# Altium PCB Nimb_Ring_2_0.PcbDoc
Units mm, origin at the board's own origin, x right, y up, seen from the top; angles counter-clockwise.
Board outline 44.45 x 67.3 mm, 4 copper layers (Top Layer, Mid-Layer2, Mid-Layer3, Bottom Layer), stack 0.58 mm thick; 68 components, 41 nets, 161 pads, 55 vias.
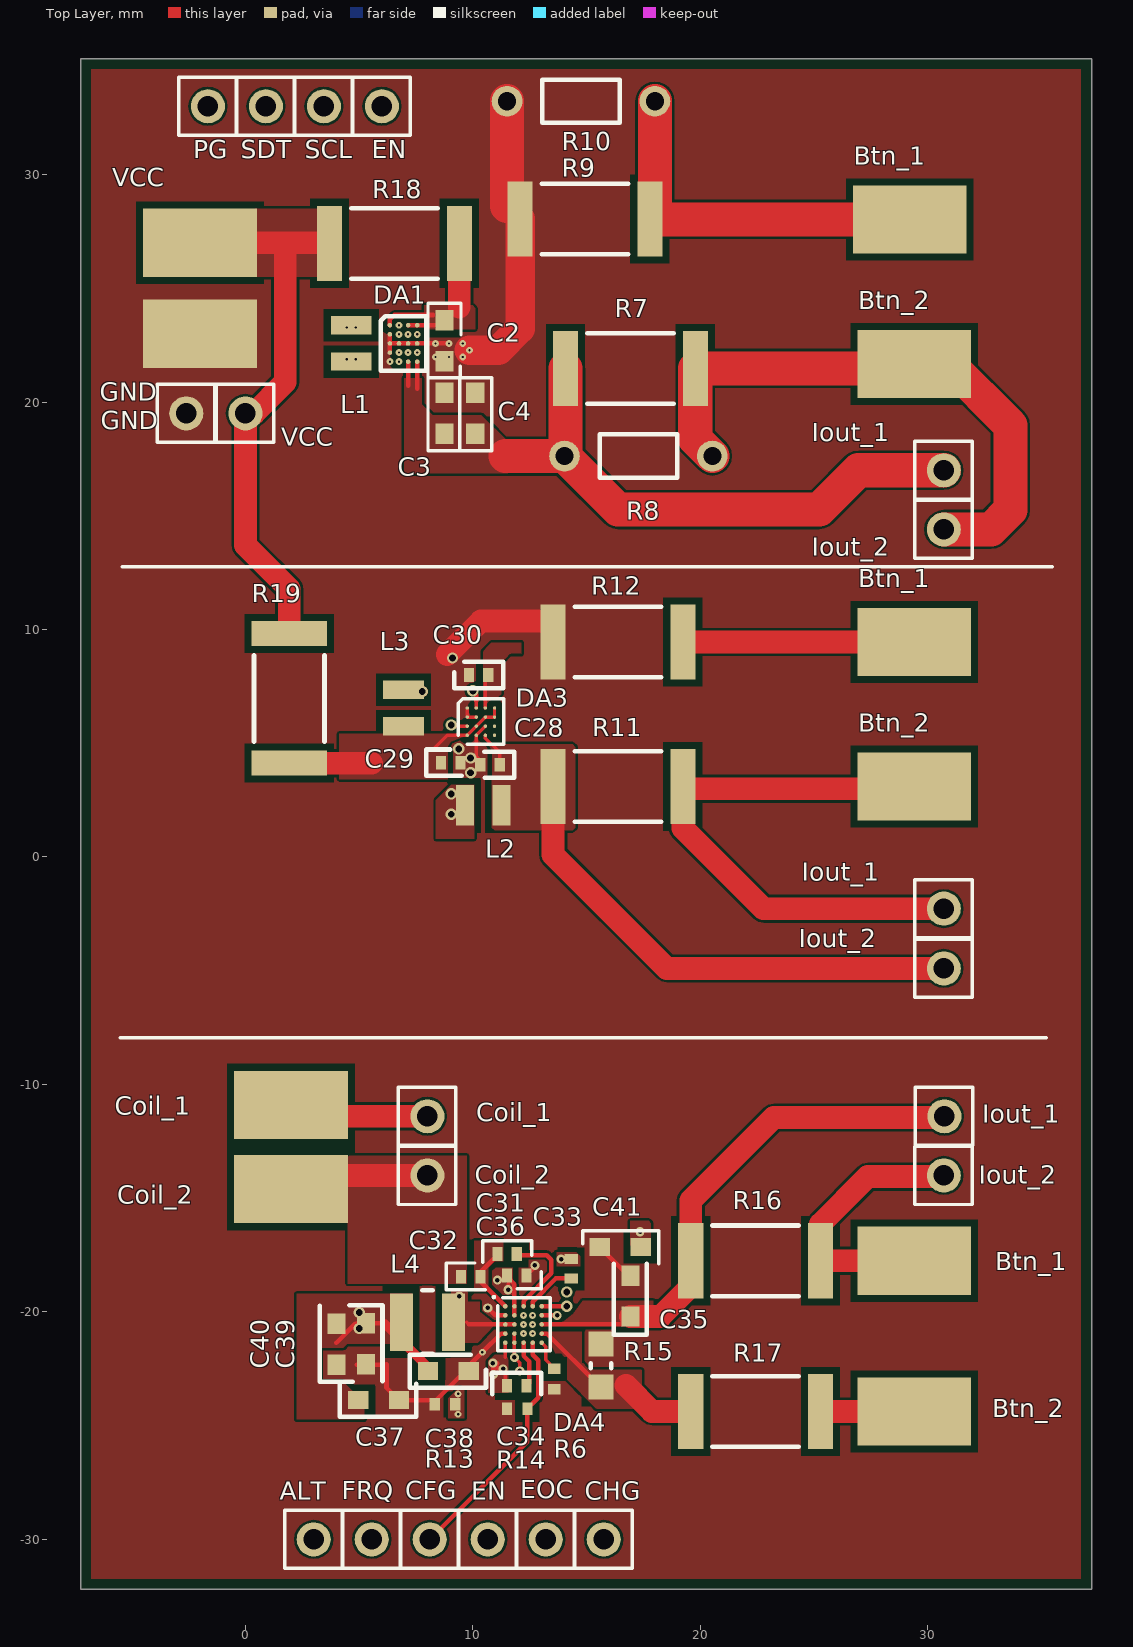
[diagram p0: Top Layer view]
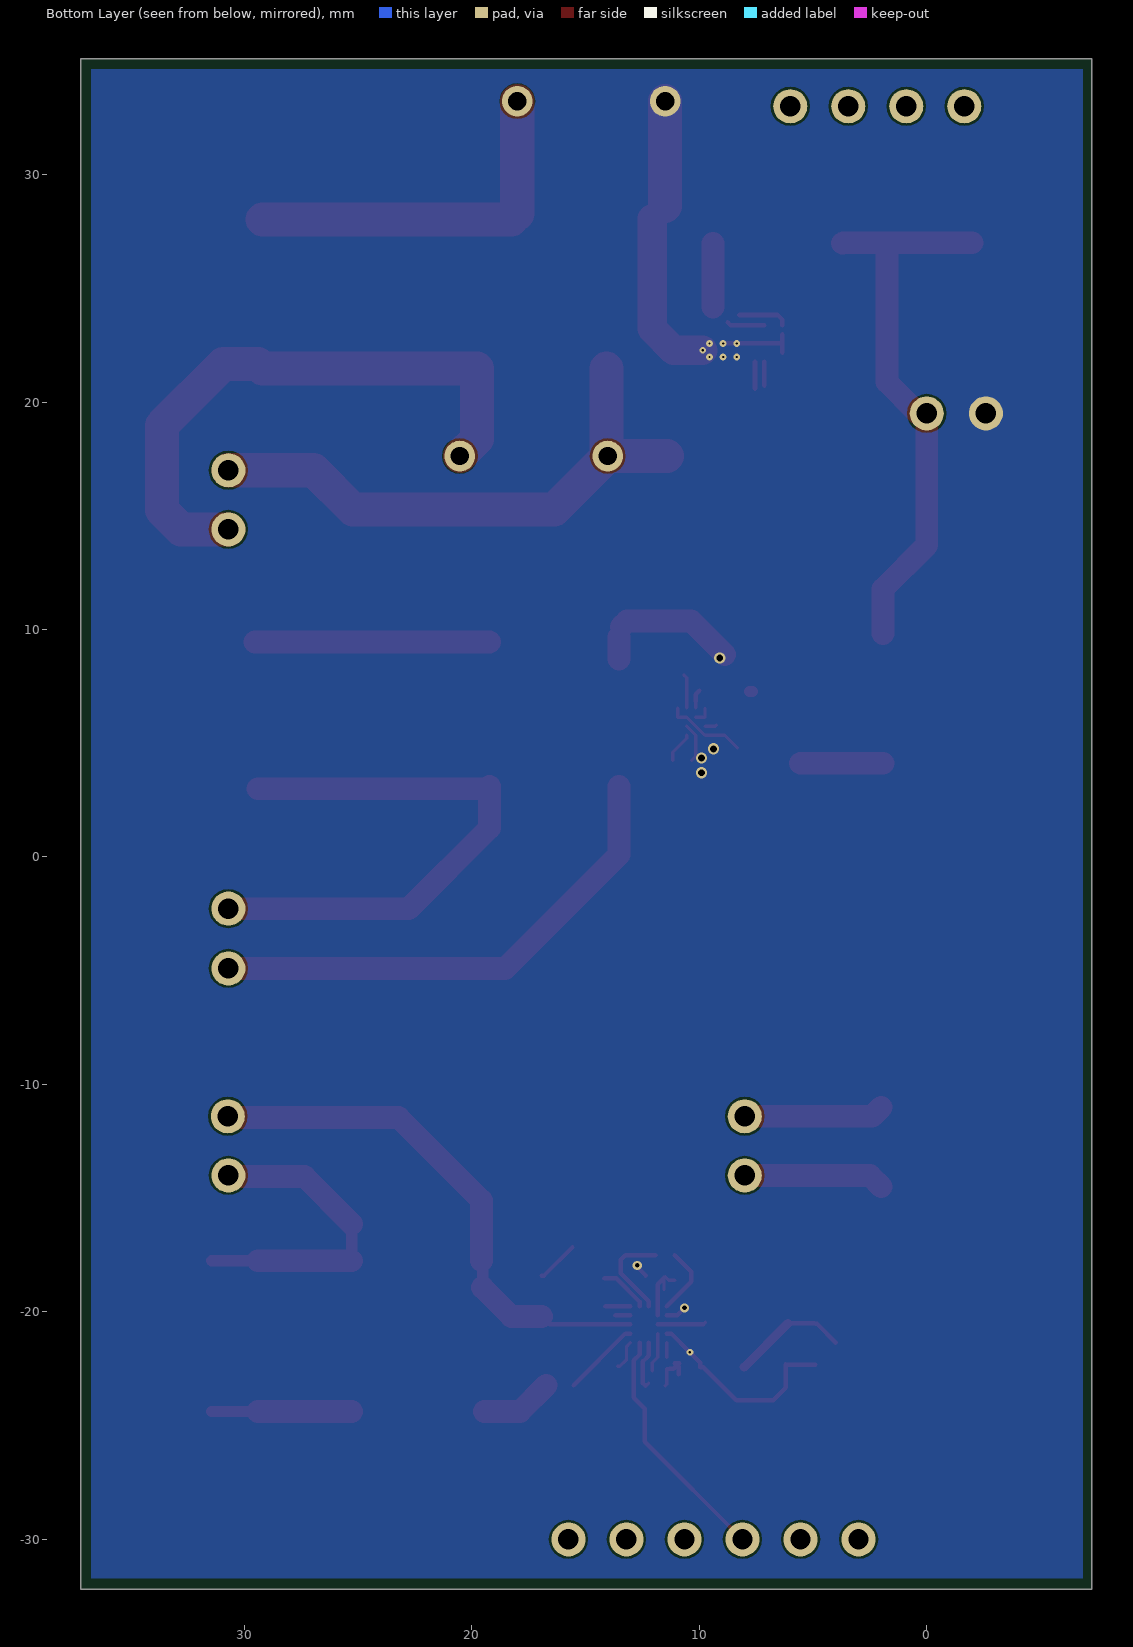
[diagram p1: Bottom Layer view, seen from below]
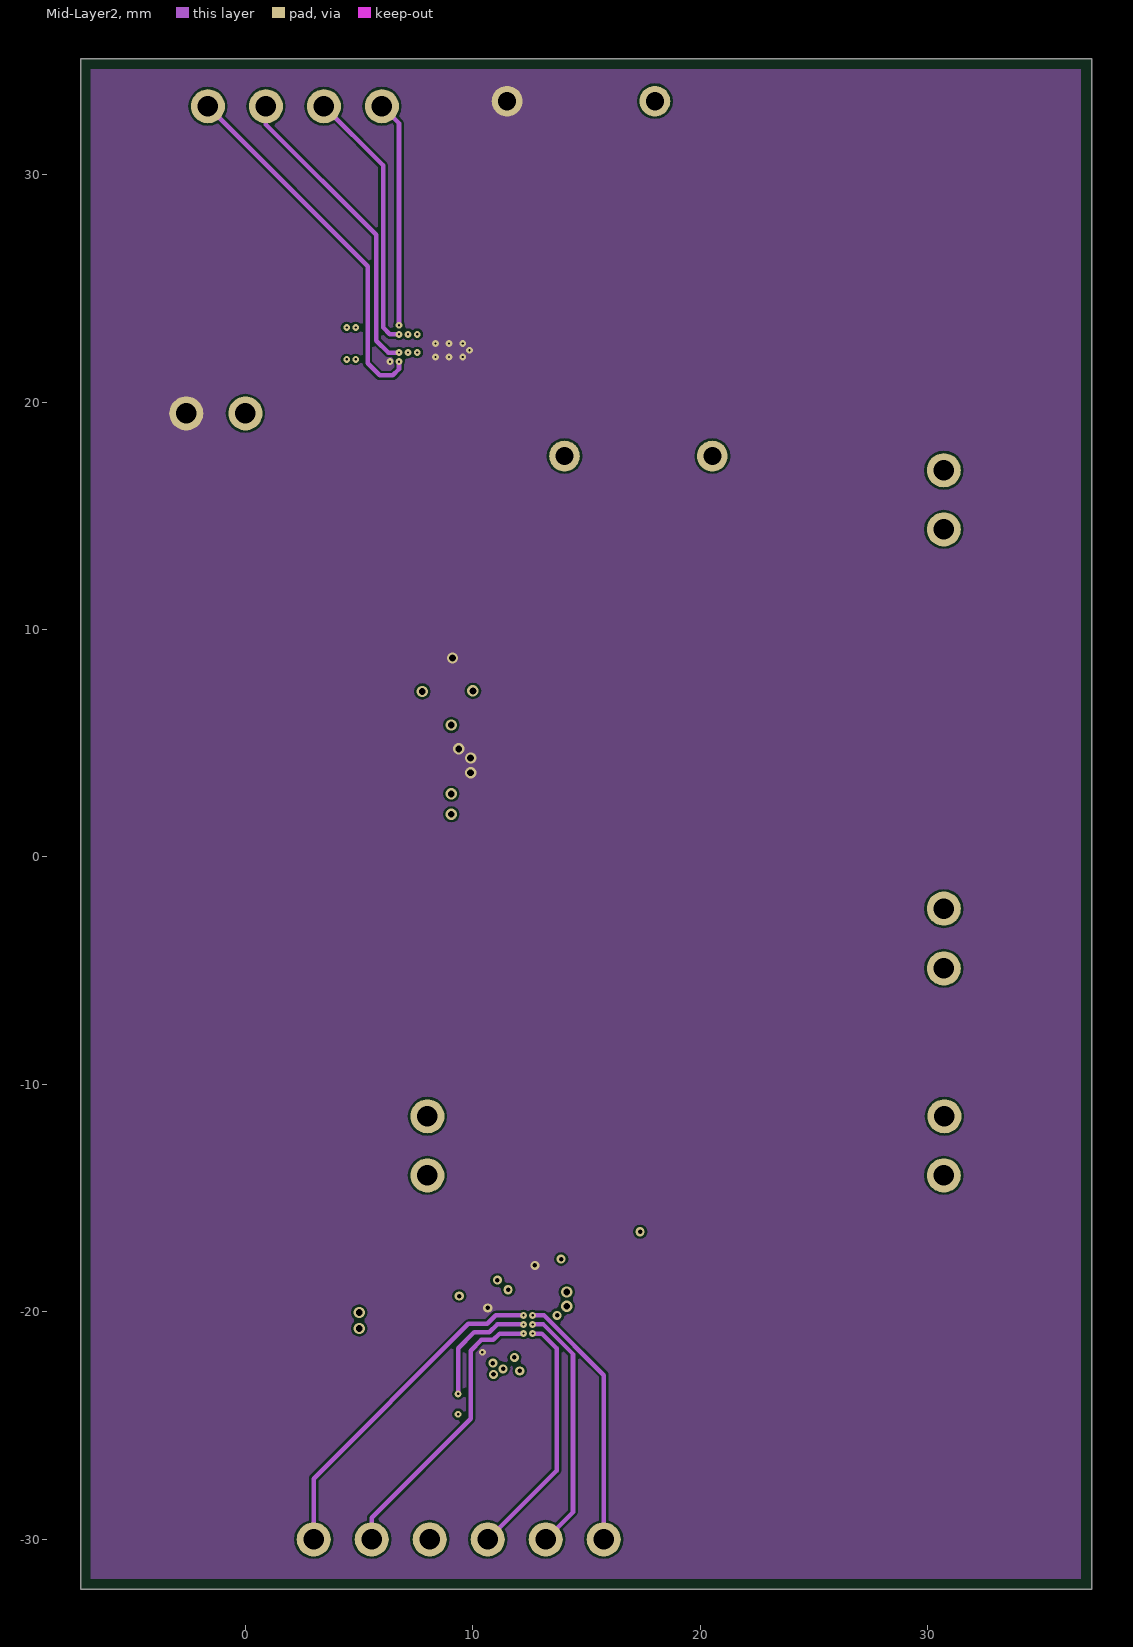
[diagram p2: Mid-Layer2]
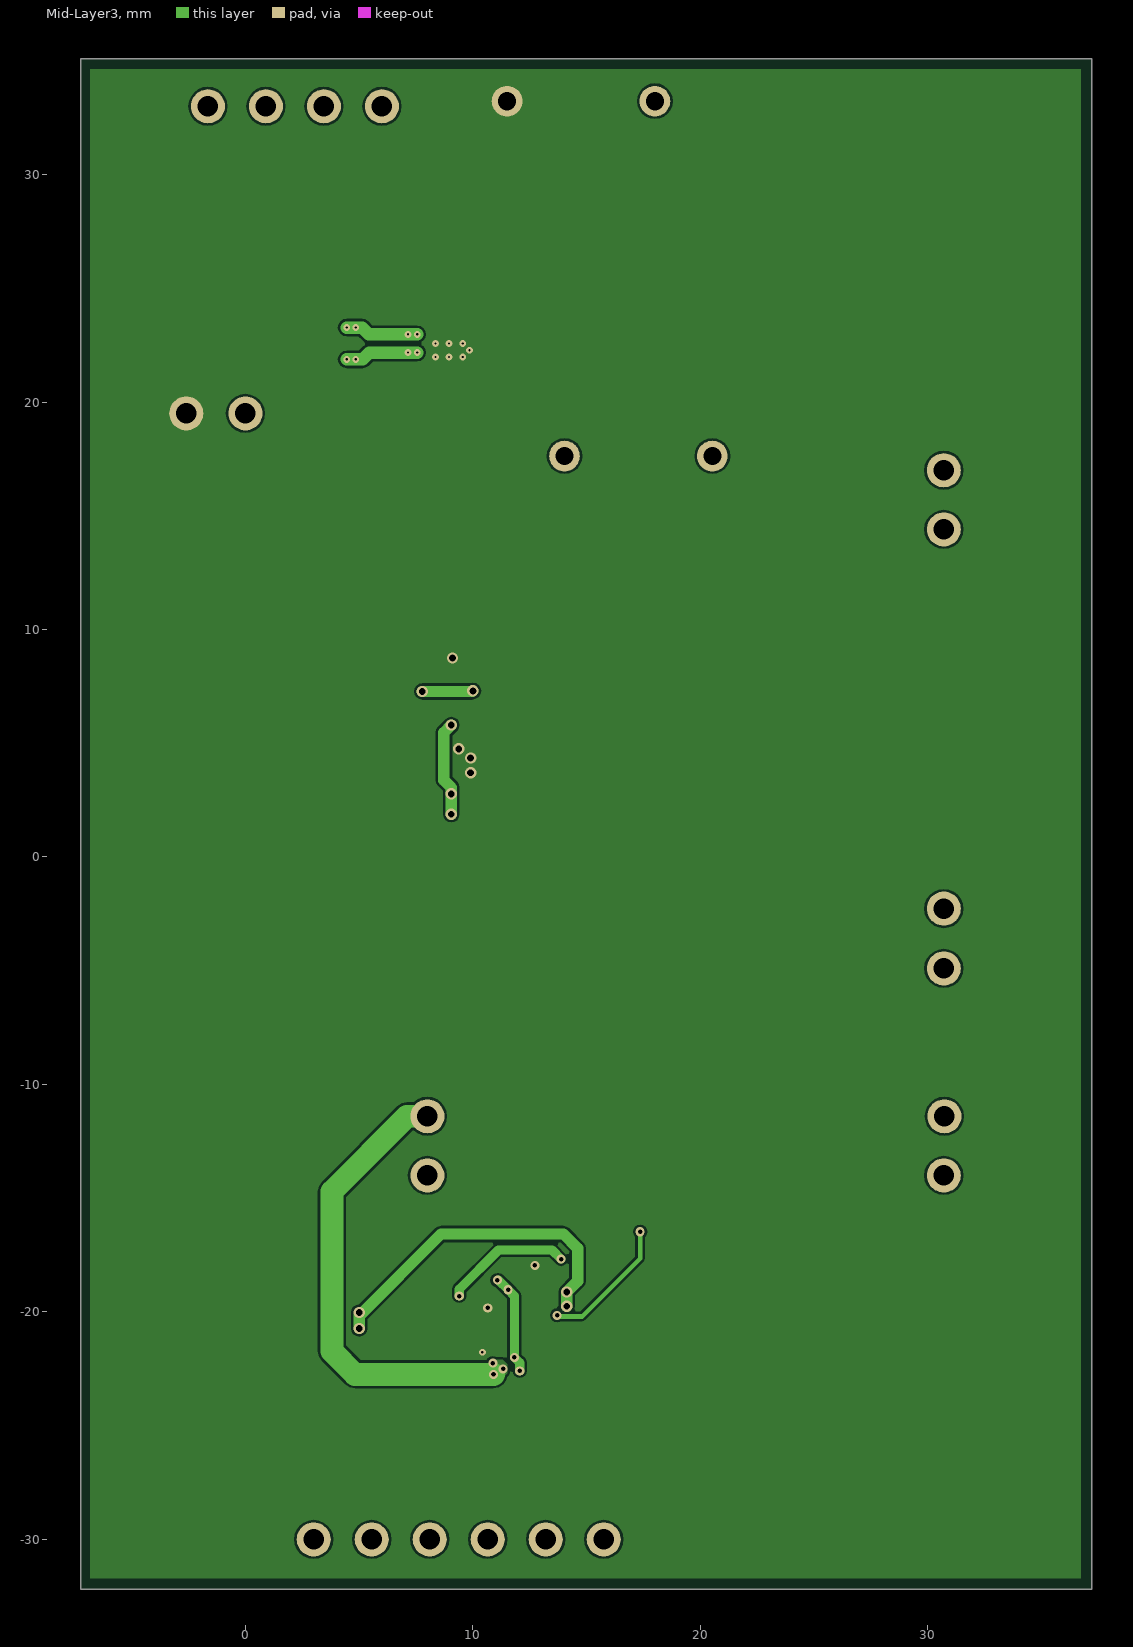
[diagram p3: Mid-Layer3]

## Layer stack, top to bottom
Top Solder: solder mask 0.0102, Solder Resist, Dk 3.5
Top Layer: signal copper 0.018
Dielectric 1: core 0.127, FR-4, Dk 4.2
Mid-Layer2: signal copper 0.018
Dielectric 3: core 0.254, FR-4, Dk 4.2
Mid-Layer3: signal copper 0.018
Dielectric 2: core 0.127, FR-4, Dk 4.2
Bottom Layer: signal copper 0.018
Bottom Solder: solder mask 0.0102, Solder Resist, Dk 3.5

## Board outline
-7.25,-32.2 -7.25,35.1 37.2,35.1 37.2,-32.2

## Design rules (kind name [scope] priority, off if disabled: settings)
Clearance Components [All] p1: gap=0.1 ignorepadtopadclearanceinfootprint=FALSE except(0: Arc-Hole Track-Hole SMDPad-Hole THPad-Hole Via-Hole Fill-Hole Poly-Hole Region-Hole Text-Hole; 0.3: SMDPad-Fill SMDPad-Poly SMDPad-Region)
Clearance Extern_Layers [OnTop Or OnBottom vs OnTop Or OnBottom] p2: gap=0.1 ignorepadtopadclearanceinfootprint=FALSE except(0: Arc-Hole Track-Hole SMDPad-Hole THPad-Hole Via-Hole Fill-Hole Poly-Hole Region-Hole Text-Hole; 0.3: SMDPad-Fill SMDPad-Poly SMDPad-Region)
Clearance VIA_Internal [IsVia vs OnLayer('Mid-Layer2') or OnLayer('Mid-Layer3')] p3: gap=0.15 ignorepadtopadclearanceinfootprint=FALSE except(0: Arc-Hole Track-Hole SMDPad-Hole THPad-Hole Via-Hole Fill-Hole Poly-Hole Region-Hole Text-Hole)
Clearance VIA_External [IsVia vs (OnLayer('Bottom Layer')) or (OnLayer('Top Layer'))] p4: gap=0.1 ignorepadtopadclearanceinfootprint=FALSE except(0: Arc-Hole Track-Hole SMDPad-Hole THPad-Hole Via-Hole Fill-Hole Poly-Hole Region-Hole Text-Hole)
ComponentClearance [All] p1: gap=0 collisioncheckmode=3 verticalgap=0 showdistances=FALSE
PlaneClearance [All] p1: clearance=0.15
PlaneConnect [All] p1: planeconnectstyle=Direct reliefexpansion=0.508 reliefentries=4 reliefconductorwidth=0.254 reliefairgap=0.254
PolygonConnect [All] p1: connectstyle=Direct reliefconductorwidth=0.254 reliefentries=4 polygonreliefangle="90 Angle" airgapwidth=0.254
RoutingVias [All] p1: holewidth=0.2 width=0.5 viastyle="Through Hole" minholewidth=0.1 minwidth=0.3 maxholewidth=0.7 maxwidth=1.27
SolderMaskExpansion [All] p1: expansion=0.102
Width [All] p1: maxlimit=2 minlimit=0.1 preferedwidth=0.254
27 further rules are at their usual default settings.

## Components (designator, comment, footprint, x,y, rotation, side; value= is the part's Value field where it differs from the comment)
ALT "Test_Pad" Test_Pad_PLS1#1 3,-30 r90 top (schematic designator TP29)
Btn_1 "Test_Pad" TEST_PAD_Button#1 29.2,28.025 r0 top (schematic designator TP2)
Btn_1 "Test_Pad" TEST_PAD_Button#2 23.225,9.648 r0 top (schematic designator TP6)
Btn_1 "Test_Pad" Test_Pad_PLS1#2 30.7,-11.4 r90 top (schematic designator TP11)
Btn_2 "Test_Pad" TEST_PAD_Button#1 29.4,21.673 r0 top (schematic designator TP1)
Btn_2 "Test_Pad" TEST_PAD_Button#3 23.35,3 r0 top (schematic designator TP5)
Btn_2 "Test_Pad" Test_Pad_PLS1#1 30.7,-14 r90 top (schematic designator TP12)
C2 "47u" Cap0603 8.75,22.7 r90 top
C3 "47u" Cap0603 8.75,19.5 r270 top
C4 "47u" Cap0603 10.1,19.5 r270 top
C28 "10u" Cap0402 10.75,4.05 r0 top
C29 "10u" Cap0402 9.025,4.15 r180 top
C30 "10u" Cap0402 10.25,8 r0 top
C31 "47n" Cap0402 11.505,-17.45 r0 top
C32 "47n" Cap0402 9.905,-18.45 r0 top
C33 "47n" Cap0402 14.325,-18.1 r270 top
C34 "47n" Cap0402 11.925,-23.25 r0 top
C35 "2.2u" Cap0603 16.925,-19.3 r90 top
C36 "2.2u" Cap0402 11.925,-18.4 r0 top
C37 "22u" Cap0603 5.85,-23.875 r0 top
C38 "22u" Cap0603 8.925,-22.6 r0 top
C39 "22u" Cap0603 5.3,-21.4 r270 top
C40 "22u" Cap0603 4,-21.425 r270 top
C41 "2.2u" Cap0603 16.475,-17.15 r180 top
CFG "Test_Pad" Test_Pad_PLS1#1 8.1,-30 r90 top (schematic designator TP25)
CHG "Test_Pad" Test_Pad_PLS1#1 15.75,-30 r90 top (schematic designator TP28)
Coil_1 "Test_Pad" Test_Pad_PLS1#1 8,-11.4 r90 top (schematic designator TP13)
Coil_1 "Test_Pad" TEST_PAD_Button#1 2,-10.9 r180 top (schematic designator TP15)
Coil_2 "Test_Pad" Test_Pad_PLS1#1 8,-14 r90 top (schematic designator TP14)
Coil_2 "Test_Pad" TEST_PAD_Button#1 2,-14.6 r180 top (schematic designator TP16)
DA1 "FAN49103" WLCSP20 6.35,23.375 r0 top
DA3 "TPS62770" DSBGA16 9.75,6.55 r0 top
DA4 "TS51224" "BGA_25 (5x5 ARRAY)" 12.225,-20.55 r0 top
EN "Test_Pad" Test_Pad_PLS1#1 10.65,-30 r90 top (schematic designator TP26)
EN "Test_Pad" Test_Pad_PLS1#1 6,33 r90 top (schematic designator TP24)
EOC "Test_Pad" Test_Pad_PLS1#1 13.2,-30 r90 top (schematic designator TP27)
FRQ "Test_Pad" Test_Pad_PLS1#1 5.55,-30 r90 top (schematic designator TP30)
GND "Test_Pad" Test_Pad_PLS1#1 -2.6,19.5 r90 top (schematic designator TP20)
GND "Test_Pad" TEST_PAD_Button#4 -0.45,22.9 r180 top (schematic designator TP19)
Iout_1 "Test_Pad" Test_Pad_PLS1#1 30.7,17 r0 top (schematic designator TP3)
Iout_1 "Test_Pad" Test_Pad_PLS1#1 30.7,-2.27 r0 top (schematic designator TP8)
Iout_1 "Test_Pad" TEST_PAD_Button#5 30.8,-17.625 r0 top (schematic designator TP9)
Iout_2 "Test_Pad" Test_Pad_PLS1#1 30.7,14.4 r0 top (schematic designator TP4)
Iout_2 "Test_Pad" Test_Pad_PLS1#1 30.7,-4.9 r0 top (schematic designator TP7)
Iout_2 "Test_Pad" TEST_PAD_Button#6 30.925,-24.375 r180 top (schematic designator TP10)
L1 "1uH" Ind_0806 4.65,22.575 r270 top
L2 "2.2uH" IND_0806(2016metric) 10.45,2.275 r0 top
L3 "10uH" IND_0806(2016metric) 6.95,6.55 r90 top
L4 "4.7uH" COIL-1008CS_V 8,-20.45 r270 top
PG "Test_Pad" Test_Pad_PLS1#1 -1.65,33 r90 top (schematic designator TP23)
R6 "50k" RESC0402(1005)_L 13.575,-22.95 r90 top
R7 "0" RES2512(6332M) 16.925,21.475 r180 top
R8 "0" RES6.5-3.4X1.9 17.275,17.625 r180 top
R9 "1.8" RES2512(6332M) 14.925,28.05 r180 top
R10 "0" RES6.5-3.4X1.9 14.75,33.225 r180 top
R11 "0" RES2512(6332M) 16.375,3.1 r180 top
R12 "6" RES2512(6332M) 16.375,9.45 r180 top
R13 "100k" RESC0402(1005)_L 8.775,-24.05 r0 top
R14 "47k" RESC0402(1005)_L 11.946,-24.25 r0 top
R15 "0" RES0603(1608M) 15.625,-22.35 r90 top
R16 "0" RES2512(6332M) 22.425,-17.75 r180 top
R17 "0" RES2512(6332M) 22.425,-24.375 r180 top
R18 "0" RES2512(6332M) 6.55,26.975 r0 top
R19 "0" RES2512(6332M) 1.925,6.975 r270 top
SCL "Test_Pad" Test_Pad_PLS1#1 3.45,33 r90 top (schematic designator TP22)
SDT "Test_Pad" Test_Pad_PLS1#1 0.9,33 r90 top (schematic designator TP21)
VCC "Test_Pad" Test_Pad_PLS1#1 0,19.5 r90 top (schematic designator TP18)
VCC "Test_Pad" TEST_PAD_Button#7 -0.85,26.975 r180 top (schematic designator TP17)

## Footprints (in the part's own frame and the unit in brackets; to place one, negate y for a bottom-side part, rotate by r counter-clockwise, add the part's x,y. Pads: shape width x height; smd on the part's side, far side on the other; paste and mask are expansions set on the pad)
"BGA_25 (5x5 ARRAY)" [mm] "BGA, 25-Leads, Body 2.2x2.4mm, Pitch 0.4mm"
  round 0.2 smd: A1(-0.8,0.8) A2(-0.4,0.8) A3(0,0.8) A4(0.4,0.8) A5(0.8,0.8) B1(-0.8,0.4) B2(-0.4,0.4) B3(0,0.4) B4(0.4,0.4) B5(0.8,0.4) C1(-0.8,0) C2(-0.4,0) C3(0,0) C4(0.4,0) C5(0.8,0) D1(-0.8,-0.4) D2(-0.4,-0.4) D3(0,-0.4) D4(0.4,-0.4) D5(0.8,-0.4) E1(-0.8,-0.8) E2(-0.4,-0.8) E3(0,-0.8) E4(0.4,-0.8) E5(0.8,-0.8)
  silkscreen extent -1.35,1.16 -1.25,1.25, body extent -1.15,-1.15 1.15,1.15, height 0.63
Cap0402 [mm]
  rect 0.45x0.6 smd: 1(-0.425,0) 2(0.425,0)
  silkscreen extent -0.25,-0.58 1.07,0.58, body extent -0.5,-0.25 0.5,0.25, height 0.5
Cap0603 [mm]
  rect 0.9x0.8 smd: 1(-0.9,0) 2(0.9,0)
  silkscreen extent -1.7,-0.72 1.65,0.72, body extent -0.8,-0.4 0.8,0.4, height 0.5
COIL-1008CS_V [mm] "SMD, 2-Leads, Body 2.92x2.79mm"
  rect 2.54x1.02 smd: 1(0,1.145) 2(0,-1.145)
  silkscreen extent -1.4,-0.24 1.4,0.24, body extent -1.39,-1.46 1.4,1.46, height 2.03
DSBGA16 [mm] "1.58 x 1.58mm WCSP Package 0.4mm  pitch"
  round 0.15 smd: A1(0,0) A2(0.4,0) A3(0.8,0) A4(1.2,0) B1(0,-0.4) B2(0.4,-0.4) B3(0.8,-0.4) B4(1.2,-0.4) C1(0,-0.8) C2(0.4,-0.8) C3(0.8,-0.8) C4(1.2,-0.8) D1(0,-1.2) D2(0.4,-1.2) D3(0.8,-1.2) D4(1.2,-1.2)
  silkscreen extent -0.4,-1.6 1.6,0.4, body extent -0.2,-1.38 1.38,0.2, height 0.5
Ind_0806 [mm] "Chip Inductor, 2-Leads, Body 2.1x1.6mm, IPC Medium Density"
  rect 0.8x1.8 smd: 1(-0.8,0) 2(0.8,0)
  body extent -1,-0.8 1,0.8, height 1
IND_0806(2016metric) [mm] "Chip Inductor, 2-Leads, Body 2.1x1.6mm, IPC Medium Density"
  rect 0.8x1.8 smd: 1(-0.8,0) 2(0.8,0)
  body extent -1,-0.8 1,0.8, height 1
RES6.5-3.4X1.9 [mm] "Resistor, Axial; Body 3.4 x 1.9 mm (LxDia. max), Lead Dia. 0.5 mm (max)"
  round 1.35 hole 0.8: 1(-3.25,0) 2(3.25,0)
  silkscreen extent -1.7,-0.95 1.7,0.95
RES0603(1608M) [mm] "Chip Resistor, Body 1.6x0.8mm, IPC Low Density"
  rect 1.1x1.1 smd: 1(-0.95,0) 2(0.95,0)
  silkscreen extent -0.12,-0.45 0.1,0.45, body extent -0.85,-0.48 0.85,0.48, height 0.6
RES2512(6332M) [mm] "Chip Resistor, Body 6.3x3.2mm, IPC High Density"
  rect 1.1x3.3 smd: 1(-2.85,0) 2(2.85,0)
  silkscreen extent -1.9,-1.55 1.9,1.55, body extent -3.22,-1.68 3.22,1.68, height 0.71
RESC0402(1005)_L [mm] "Chip Resistor, Body 1.0x0.5mm, IPC High Density"
  rect 0.45x0.55 smd: 1(-0.45,0) 2(0.45,0)
  body extent -0.52,-0.27 0.53,0.28, height 0.4
TEST_PAD_Button#1 [mm]
  rect 5x3 smd: 1(0,0)
TEST_PAD_Button#2 [mm]
  rect 5x3 smd: 1(6.175,-0.198)
TEST_PAD_Button#3 [mm]
  rect 5x3 smd: 1(6.05,0.1)
TEST_PAD_Button#4 [mm]
  rect 5x3 smd: 1(1.55,-0.1)
TEST_PAD_Button#5 [mm]
  rect 5x3 smd: 1(-1.4,-0.125)
TEST_PAD_Button#6 [mm]
  rect 5x3 smd: 1(1.525,0)
TEST_PAD_Button#7 [mm]
  rect 5x3 smd: 1(1.15,-0.025)
Test_Pad_PLS1#1 [mm]
  round 1.5 hole 0.9 paste+0.1 mask+0: 1(0,0)
  body extent -1.27,-1.27 1.27,1.27, height 8.44
Test_Pad_PLS1#2 [mm]
  round 1.5 hole 0.9 paste+0.1 mask+0: 1(0,-0.025)
  body extent -1.27,-1.27 1.27,1.27, height 8.44
WLCSP20 [mm]
  round 0.2 smd: A1(0,0) A2(0.4,0) A3(0.8,0) A4(1.2,0) B1(0,-0.4) B2(0.4,-0.4) B3(0.8,-0.4) B4(1.2,-0.4) C1(0,-0.8) C2(0.4,-0.8) C3(0.8,-0.8) C4(1.2,-0.8) D1(0,-1.2) D2(0.4,-1.2) D3(0.8,-1.2) D4(1.2,-1.2) E1(0,-1.6) E2(0.4,-1.6) E3(0.8,-1.6) E4(1.2,-1.6)
  silkscreen extent -0.4,-2 1.6,0.4, body extent -0.2,-1.8 1.4,0.2, height 0.6

## Part data
C2 C3 C4: library part C, "CAP CER 47UF 6.3V X5R 0603", Manufacturer=Murata, ManufacturerPartNumber=GRM188R60J476ME15J, Power/Voltage=6.3V, Tolerance=20%
  C2: Type=0402
  C3 C4: Type=0603
C28 C29 C30: library part C, "CAP CER 10UF 6.3V X5R 0402", Manufacturer=MURATA, ManufacturerPartNumber=GRM155R60J106ME44D, Package=0402, Power/Voltage=6.3V, Tolerance=20%, DataSheet=https://www.compel.ru/item-pdf/703bf2d700417c16d8c0e48aedab8cc2/ps/mur~grm.pdf, Supplier=https://www.compel.ru/infosheet/MUR/GRM155R60J106ME44D
C31 C32 C34: library part C, "CAP CER 47nF 50V X5R 0402", Manufacturer=MURATA, ManufacturerPartNumber=GRM155R71H473KE14D, Package=0402, Power/Voltage=50V, Tolerance=10%, DataSheet=https://www.compel.ru/item-pdf/703bf2d700417c16d8c0e48aedab8cc2/ps/mur~grm.pdf, Supplier=https://www.compel.ru/infosheet/MUR/GRM155R71H473KE14D
C33: library part C, "CAP CER 47nF 10V X5R 0402", Manufacturer=MURATA, ManufacturerPartNumber=GRM155R61A473KA01D, Package=0402, Power/Voltage=10V, Tolerance=10%, DataSheet=https://www.compel.ru/item-pdf/703bf2d700417c16d8c0e48aedab8cc2/ps/mur~grm.pdf, Supplier=https://www.compel.ru/infosheet/MUR/GRM155R61A473KA01D
C35 C41: library part C, "CAP CER 2.2UF 10V X5R 0402", Manufacturer=MURATA, ManufacturerPartNumber=GRM155R61A225KE95D, Package=0402, Power/Voltage=10V, Tolerance=10%, DataSheet=https://www.compel.ru/item-pdf/703bf2d700417c16d8c0e48aedab8cc2/ps/mur~grm.pdf, Supplier=https://www.compel.ru/infosheet/MUR/GRM155R61A225KE95D
C36: library part C, "CAP CER 2.2UF 25V X5R 0402", Manufacturer=MURATA, ManufacturerPartNumber=GRM155R61E225KE11D, Package=0402, Power/Voltage=25V, Tolerance=10%, DataSheet=https://www.compel.ru/item-pdf/703bf2d700417c16d8c0e48aedab8cc2/ps/mur~grm.pdf, Supplier=https://www.compel.ru/infosheet/MUR/GRM155R61E225KE11D
C37 C38 C39 C40: library part C, "CAP CER 22UF 10V X5R 0603", Manufacturer=MURATA, ManufacturerPartNumber=ZRB18AR61A226ME01L, Package=0603(1608metric), Power/Voltage=10V, Tolerance=15%, DataSheet=https://ru.mouser.com/datasheet/2/281/product-1108674.pdf, Supplier=https://ru.mouser.com/ProductDetail/Murata-Electronics/ZRB18AR61A226ME01L?qs=sGAEpiMZZMs0AnBnWHyRQN7%2fAA2D2lPPknK%252bZ26wfT%2fc2YZrPwOUrA%3d%3d
DA1: "I2C Buck-Boost Regulator 2.5A", Manufacturer="ON Semiconductor", ManufacturerPartNumber=FAN49103
DA3: "Multi-Rail DC/DC Converter", Manufacturer="Texas Instruments", ManufacturerPartNumber=TPS62770
DA4: "IC RCVR CTLR WIRELESS 20-WLCSP", Manufacturer=SEMTECH, DataSheet=https://ru.mouser.com/pdfdocs/ts51224_datasheet-1276106.pdf, ManufacturerPartNumber=TS51224
L1: library part L, "FIXED IND 1UH 3.4A 0.048OHM", Manufacturer=Murata, ManufacturerPartNumber=DFE201612E1R0M, Power/Voltage=3.4A, Tolerance=20%, Type=0806
L2: library part L, "FIXED IND 2.2UH 1.2A 204mOHM", Manufacturer=MURATA, ManufacturerPartNumber=1285AS-H-2R2M=P2, Package=0806(2016metric), Power/Voltage=1.2A, Tolerance=20%, DataSheet=https://ru.mouser.com/datasheet/2/281/product-1023242.pdf, Supplier=https://www.compel.ru/infosheet/MUR/1285AS-H-2R2M%3DP2
L3: library part L, "FIXED IND 10UH 225mA 1.2OHM", Manufacturer=MURATA, ManufacturerPartNumber=LQH2MCN100K02L, Package=0806(2016metric), Power/Voltage=225mA, Tolerance=10%, DataSheet=https://www.compel.ru/item-pdf/76de7fb58d43fc1b170a27bea408750b/pf/mur~lq.pdf, Supplier=https://www.compel.ru/infosheet/MUR/LQH2MCN100K02L
L4: library part L, "IND SMD 1008 4.7UH 1A 0.11OHM", Manufacturer=Bourns, ManufacturerPartNumber=CVH252009-4R7M, Power/Voltage=1A, Tolerance=20%, DataSheet=https://www.compel.ru/item-pdf/fd3d436d9fb9cbb3cd94496c14e882b0/ps/bourns~cvh252009.pdf
R6: library part R, "RES SMD 49.9kOHM 1% 62.5mW 0402", Manufacturer=Yageo, ManufacturerPartNumber=RC0402FR-0749K9L, Package=0402, Power/Voltage=62.5mW, Tolerance=1%, DataSheet=https://www.compel.ru/item-pdf/01745689dfc7640c8aba99ada61670c4/pn/yag~res-0402-43k-1-.pdf, Supplier=https://www.compel.ru/infosheet/YAG/RC0402FR-0749K9L
R7 R11 R16 R18 R19: library part R, "RES SMD 0 OHM 5% 1W 2512", Manufacturer=Bourns, ManufacturerPartNumber=CR2512-J/-000ELF, Package=2512, Power/Voltage=1W, Tolerance=5%, DataSheet=https://www.compel.ru/item-pdf/2973128a4d6e6fdc81c175f1f47afa18/ps/bourns~cr2512.pdf, Supplier=https://www.compel.ru/infosheet/BOURNS/CR2512-J%2F-000ELF, TKE/TKC=200ppm/C
R8 R10: library part R, "Axial", Package=AXIAL
R9: library part R, "RES SMD 1.8OHM 5% 2W 2512", Manufacturer=Bourns, ManufacturerPartNumber=CRM2512-JW-1R8ELF, Power/Voltage=2W
R12: library part R, "RES SMD 6OHM 5% 1W 2512", Manufacturer=Yageo, ManufacturerPartNumber=RC2512FK-076R04L, Power/Voltage=1W, Tolerance=1%
R13: library part R, "RES SMD 100kOHM 5% 62.5mW 0402", Manufacturer=Yageo, ManufacturerPartNumber=RC0402JR-07100KL, Power/Voltage=62.5, Tolerance=5%, DataSheet=https://www.compel.ru/item-pdf/01745689dfc7640c8aba99ada61670c4/pn/yag~res-0402-43k-1-.pdf, Supplier=https://www.compel.ru/infosheet/YAG/RC0402JR-07100KL
R14: library part R, "RES SMD 47kOHM 5% 62.5mW 0402", Manufacturer=Yageo, ManufacturerPartNumber=RC0402JR-0747KL, Power/Voltage=62.5mW, Tolerance=5%, DataSheet=https://www.compel.ru/item-pdf/01745689dfc7640c8aba99ada61670c4/pn/yag~res-0402-43k-1-.pdf, Supplier=https://www.compel.ru/infosheet/YAG/RC0402JR-0747KL
R15: library part R, "RES SMD 0OHM 5% 1A 0603", Manufacturer=Yageo, ManufacturerPartNumber=RC0603JR-070RL, Power/Voltage=1A, Tolerance=5%, DataSheet=https://www.compel.ru/item-pdf/6fd868d965b78d0bc656fc0ca5c850f4/pn/yag~res-0603-4k7-5-.pdf
R17: library part R

## Via types
v1: diameter 0.3, hole 0.1, Top Layer to Mid-Layer2, 13 vias
v2: diameter 0.4, hole 0.2, Top Layer to Mid-Layer3, 11 vias
v3: diameter 0.5, hole 0.3, Top Layer to Mid-Layer3, 9 vias
v4: diameter 0.3, hole 0.1, Top Layer to Bottom Layer, 8 vias
v5: diameter 0.3, hole 0.1, Top Layer to Mid-Layer3, 8 vias
v6: diameter 0.5, hole 0.3, Top Layer to Bottom Layer, 4 vias
v7: diameter 0.4, hole 0.2, Top Layer to Bottom Layer, 2 vias

## Nets (pads, with @x,y where several pads share a name; then routed paths per layer and width w, separated by ;. In a path a pad name is that pad's centre, name@x,y a point inside that pad or via, vN(x,y) a via of type N, cw(c..) or ccw(c..) an arc to the next point about the centre after c; other vN are vias at no path point)
1V8: C28.2 DA3.D3 Iout_2.1@30.7,-4.9 L2.2 R11.2 | length 23.6
  Top Layer w0.15: DA3.D3 10.55,5.225 11.175,4.6 C28.2@11.175,4.25
  Top Layer w1: R11.2 13.525,0.1 18.525,-4.9 Iout_2.1@30.7,-4.9
2V8/2A: C3.2 C4.2 DA1.E3 DA1.E4 Iout_1.1@30.7,17 R7.2 R8.2 | length 27
  Top Layer w0.2: 7.15,20.725 DA1.E3 ; 7.55,20.575 DA1.E4
  Top Layer w1.5: 11.425,17.625 13.925,17.625 14.075,17.775 R7.2 ; R8.2 16.375,15.275 25.225,15.275 26.95,17 Iout_1.1@30.7,17
12V: C30.2 DA3.A3 | length 1.5
  Top Layer w0.15: DA3.A3 10.55,7.875 C30.2
AC1: C32.1 Coil_2.1 | length 6.2
  Top Layer w1: Coil_2.1@2,-14.5 2.5,-14 Coil_2.1@8,-14
AC2: C34.1 Coil_1.1 DA4.E1 | length 29
  Top Layer w0.15: v2@11.425,-22.5 11.425,-23.175 C34.1 ; 11.425,-22 DA4.E1
  Top Layer w0.2: v2(10.904,-22.744) 10.904,-22.421 v2@10.975,-22.35 ; v2(11.325,-22.5) 11.125,-22.5 v2@10.975,-22.35 ; v2@10.975,-22.35 11.075,-22.25 v2(10.875,-22.25) v2@10.975,-22.35
  Top Layer w1: Coil_1.1@2,-11 2.4,-11.4 Coil_1.1@8,-11.4
  Mid-Layer3 w1: Coil_1.1@8,-11.4 7.1,-11.4 3.8,-14.7 3.8,-21.725 4.819,-22.744 v2(10.904,-22.744)
ALERT_wireless: ALT.1 DA4.B3 | length 14.9
  Mid-Layer2 w0.2: ALT.1 3,-27.325 9.8,-20.525 10.625,-20.525 11,-20.15 v1(12.225,-20.15)
CHG_DIS_wireless: CHG.1 DA4.B4 | length 11.4
  Mid-Layer2 w0.2: v1(12.625,-20.15) 13.125,-20.15 15.75,-22.775 CHG.1
EN_fan: DA1.A2 EN.1@6,33 | length 9.9
  Mid-Layer2 w0.2: EN.1@6,33 6.75,32.25 v1(6.75,23.375)
EOC_wireless: DA4.C4 EOC.1 | length 11
  Mid-Layer2 w0.2: v1(12.625,-20.55) 13.1,-20.55 14.4,-21.85 14.4,-28.8 EOC.1
FB_wireless: C37.1 C38.1 C39.1 C40.1 DA4.A5 L4.2 | length 20.9
  Top Layer w0.2: 4,-21.35 4.825,-20.525 4.9,-20.525 4.925,-20.5 C39.1 6.1,-20.5 ; DA4.A5 v3(14.125,-19.75)
  Top Layer w0.4: 6.1,-20.5 C38.1@8.025,-22.425
  Mid-Layer3 w0.5: v3(5,-20.725) 5,-20.175 8.6,-16.575 13.975,-16.575 14.6,-17.2 14.6,-18.65 v3(14.125,-19.125) v3(14.125,-19.75)
  other v3: 5,-20.025
FREQ_wireless: DA4.D3 FRQ.1 | length 12.7
  Mid-Layer2 w0.2: FRQ.1 5.55,-29.05 9.9,-24.7 9.9,-21.7 10.375,-21.225 10.9,-21.225 11.175,-20.95 v1(12.225,-20.95)
GND: C2.1 C3.1 C4.1 C28.1 C29.1 C30.1 C35.2 C36.2 C37.2 C38.2 C39.2 C40.2 C41.2 DA1.B1 DA1.C1 DA1.C2 DA1.C3 DA1.C4 DA1.D1 DA1.E1 DA3.A1 DA3.B1 DA3.B2 DA3.C3 DA3.D2 DA4.B1 DA4.D1 GND.1 R6.1 R9.2 R10.2 R12.2 R13.1 R14.1 R15.2 | length 36.7
  Top Layer w0.15: DA3.A1 DA3.B1 DA3.B2 ; C28.1@10.325,4.25 10.15,4.425 DA3.D2 DA3.C3
  Top Layer w0.2: 4.9,-22.325 6.175,-22.325 6.2,-22.3 6.2,-23.325 C37.2 8.375,-23.875 9.825,-22.425 9.95,-22.425 9.95,-22.239 v4(10.414,-21.775) 11.239,-20.95 DA4.D1 ; DA1.D1 DA1.C1 ; DA1.B1 DA1.C1 ; v4(8.95,22.575) v4(8.35,22.575) DA1.C4 DA1.C3 DA1.C2 DA1.C1 ; v7(10.65,-19.825) 10.975,-20.15 DA4.B1 ; C36.2 12.725,-18.025 v7(12.725,-17.95) ; C41.2 16.825,-18.4 C35.2
  Top Layer w1: 8.875,8.9 10.35,10.375 13.175,10.375 R12.2@13.425,10.125 ; R12.2@13.525,8.7 R12.2 R12.2@13.525,9.675
  Top Layer w1.3: v4(9.85,22.275) 11.125,22.275 12.075,23.225 R9.2
  Top Layer w1.5: 11.5,28.625 R10.2
  other v1: 6.35,21.775
  other v4: 8.35,21.975 8.95,21.975 9.55,21.975 9.55,22.575
  other v6: 9.9,3.7 9.9,4.35 9.375,4.75 9.1,8.75
I2C3_DATA: DA1.D2 SDT.1 | length 13.5
  Mid-Layer2 w0.2: SDT.1 0.9,32.2 5.75,27.35 5.75,22.7 6.275,22.175 v1(6.75,22.175)
I2C3_SCL: DA1.B2 SCL.1 | length 11.6
  Mid-Layer2 w0.2: SCL.1 6.05,30.4 6.05,23.275 6.35,22.975 v1(6.75,22.975)
MOD_EN_wireless: DA4.D4 EN.1@10.65,-30 | length 11
  Mid-Layer2 w0.2: EN.1@10.65,-30 13.675,-26.975 13.675,-21.6 13.025,-20.95 v1(12.625,-20.95)
MODE_CFG_wireless: CFG.1 DA4.E4 R14.2 | length 10.7
  Top Layer w0.2: CFG.1 12.396,-25.704 R14.2 12.875,-23.771 12.875,-22.125 12.625,-21.875 DA4.E4
NetC31_2: C31.2 DA4.A3 | length 4.2
  Top Layer w0.2: C31.2@11.925,-17.5 13.25,-17.5 13.45,-17.7 13.45,-18.3 12.225,-19.525 DA4.A3
NetC33_2: C33.2 DA4.A4 | length 2.2
  Top Layer w0.2: DA4.A4 12.625,-19.549 13.649,-18.525 C33.2@14.175,-18.525
NetC34_2: C34.2 DA4.E3 | length 2.2
  Top Layer w0.15: C34.2@12.225,-23.125 C34.2
  Top Layer w0.2: DA4.E3 12.225,-21.926 12.475,-22.176 12.475,-23.125 C34.2
NetC36_1: C36.1 DA4.A2 DA4.B2 DA4.D2 DA4.E2 | length 9
  Top Layer w0.15: v2(11.075,-18.6) 11.35,-18.6 11.5,-18.45 11.55,-18.5 v2(11.55,-19.025) ; DA4.D2 DA4.E2 v2(11.825,-22) 12.06,-22.235 v2(12.06,-22.589)
  Top Layer w0.2: C36.1@11.55,-18.5 11.825,-18.775 DA4.A2 DA4.B2
  Mid-Layer3 w0.15: v2(11.075,-18.6) v2@11.125,-18.6
  Mid-Layer3 w0.4: v2@11.125,-18.6 v2(11.55,-19.025) 11.825,-19.3 v2(11.825,-22) 12.06,-22.235 v2(12.06,-22.589)
NetR7_1: Btn_2.1@29.4,21.673 Iout_2.1@30.7,14.4 R7.1 R8.1 | length 26.2
  Top Layer w1.5: R8.1 19.775,18.375 R7.1 29.202,21.475 29.4,21.673 30.927,21.673 33.625,18.975 33.625,15.25 32.775,14.4 Iout_2.1@30.7,14.4
NetR9_1: Btn_1.1@29.2,28.025 R9.1 R10.1 | length 15.9
  Top Layer w1.5: R9.1@18,28.275 R10.1 ; R9.1@18.25,28.025 Btn_1.1@29.2,28.025
NetR11_1: Btn_2.1@29.4,3.1 Iout_1.1@30.7,-2.27 R11.1 | length 25
  Top Layer w1: Btn_2.1@29.4,3 19.325,3 R11.1 19.225,1.275 22.775,-2.275 Iout_1.1@30.7,-2.275
NetR12_1: Btn_1.1@29.4,9.45 R12.1 | length 10.3
  Top Layer w1: R12.1 Btn_1.1@29.525,9.45
NetR16_1: Btn_2.1@30.7,-14 Iout_1.1@29.4,-17.75 R16.1 | length 14.1
  Top Layer w0.5: R16.1 R16.1@25.275,-16.134 ; Iout_1.1@29.4,-17.75 Iout_1.1@31.425,-17.75
  Top Layer w1: R16.1 Iout_1.1@29.4,-17.75 ; R16.1@25.275,-16.134 27.359,-14.05 Btn_2.1@30.7,-14.05
NetR17_1: Iout_2.1@29.4,-24.375 R17.1 | length 6.2
  Top Layer w0.5: Iout_2.1@29.4,-24.375 Iout_2.1@31.425,-24.375
  Top Layer w1: R17.1 Iout_2.1@29.4,-24.375
PG_fan: DA1.E2 PG.1 | length 16.2
  Mid-Layer2 w0.2: PG.1 5.375,25.975 5.375,21.7 5.9,21.175 6.475,21.175 6.75,21.45 v1(6.75,21.775)
SW1_fan: DA1.B3 DA1.B4 L1.1 | length 3.2
  Mid-Layer3 w0.55: v5(4.45,23.275) v5(4.85,23.275) 5.125,23.275 5.425,22.975 v5(7.15,22.975) v5(7.55,22.975)
SW1_tps: DA3.C1 L2.1 | length 4.7
  Top Layer w0.15: v3@9.25,5.8 9.3,5.75 DA3.C1
  Mid-Layer3 w0.5: v3(9.05,1.875) v3(9.05,2.775) 9.05,3.05 8.725,3.375 8.725,5.475 v3(9.05,5.8)
SW2_fan: DA1.D3 DA1.D4 L1.2 | length 3.2
  Mid-Layer3 w0.55: v5(4.45,21.875) v5(4.85,21.875) 5.15,21.875 5.45,22.175 v5(7.15,22.175) v5(7.55,22.175)
SW2_tps: DA3.A2 L3.2 | length 3.1
  Top Layer w0.15: DA3.A2 10.15,6.85
  Top Layer w0.2: v3(10,7.3) 10.15,7.15 10.15,6.85
  Top Layer w0.5: L3.2@7.675,7.275 v3(7.775,7.275)
  Mid-Layer3 w0.5: v3(7.775,7.275) 9.975,7.275 v3(10,7.3)
SW_wireless: C33.1 DA4.C1 DA4.C2 L4.1 | length 7.8
  Top Layer w0.15: 9.725,-20.45 9.825,-20.55
  Top Layer w0.2: 9.825,-20.55 DA4.C1 DA4.C2
  Mid-Layer3 w0.4: v2(9.4,-19.3) 9.4,-19 11.125,-17.275 13.475,-17.275 v2(13.875,-17.675)
SYSOUT_wireless: C41.1 DA4.B5 | length 6.6
  Top Layer w0.2: DA4.B5 v2(13.7,-20.15)
  Mid-Layer3 w0.2: v2(13.7,-20.15) 13.75,-20.2 14.8,-20.2 17.35,-17.65 v2(17.35,-16.475)
THERM_wireless: DA4.C3 R13.2 | length 5.3
  Mid-Layer2 w0.2: v1(9.35,-23.6) 9.35,-21.6 10.05,-20.9 10.725,-20.9 11.075,-20.55 v1(12.225,-20.55)
  other v1: 9.35,-24.5
TOP_SET: DA4.E5 R6.2 | length 1.3
  Top Layer w0.15: DA4.E5 13.2,-21.525 13.2,-22.1 13.488,-22.388 R6.2@13.584,-22.388
VAC1: C31.1 C32.2 DA4.A1 | length 3
  Top Layer w0.2: C31.1@11.075,-17.5 10.35,-18.225 10.35,-18.675 DA4.A1
VBAT+: Btn_1.1@30.725,-11.4 C35.1 DA4.C5 R16.2 | length 23.3
  Top Layer w0.2: DA4.C5 16.575,-20.55 C35.1
  Top Layer w0.5: R16.2@19.525,-18.925 R16.2@19.525,-17.75
  Top Layer w1: C35.1 18.25,-20.2 R16.2@19.525,-18.925 ; R16.2 19.575,-15.1 23.225,-11.45 Btn_1.1@30.325,-11.45
VBAT-: DA4.D5 R15.1 R17.2 | length 6.6
  Top Layer w0.2: DA4.D5 13.25,-20.95 R15.1@15.525,-23.225
  Top Layer w1: 16.725,-23.225 17.875,-24.375 R17.2@19.45,-24.375
VCC: R18.1 R19.1 VCC.1 | length 24.6
  Top Layer w1: VCC.1@-2,27 1.75,27 ; R19.1 1.925,11.775 0,13.7 0,19.5 0.375,19.5 1.75,20.875 1.75,27 ; R18.1 3.675,27 1.75,27
VCC_fan: C2.2 DA1.A1 DA1.A3 DA1.A4 R18.2 | length 6.7
  Top Layer w0.2: DA1.A1 6.35,23.625 6.55,23.825 8.25,23.825 ; DA1.A3 DA1.A4 8.625,23.375 C2.2@8.75,23.5
  Top Layer w1: 9.4,24.175 R18.2
VCC_tps62770: C29.2 DA3.A4 DA3.B3 DA3.B4 DA3.C2 DA3.D1 L3.1 R19.2 | length 7.2
  Top Layer w0.15: 8.325,4.8 8.875,5.35 DA3.D1 DA3.C2 DA3.B3 DA3.B4 DA3.A4
  Top Layer w1: R19.2 5.55,4.125
pads on no net: DA3.C4 DA3.D4

## Polygon pours and split planes (outlines as drawn)
GND on Top Layer "Top Layer-No Net 1" (solid, pour order 124): -6.775,34.625 36.725,34.625 36.725,-31.725 -6.775,-31.725
GND on Top Layer "Top Layer-No Net 1" (solid, pour order 108): 9.025,-21.675 10.125,-21.675 10.85,-21.249 10.975,-21.3 10.85,-21.675 10.425,-22.125 10.425,-23.6 10.8,-23.975 11.725,-23.975 11.725,-24.75 10.425,-24.75 9.025,-24.75 6.05,-24.75 6.05,-23.25 5.643,-23.25 4.85,-23.25 4,-22.4 4,-22.025 7.125,-22.025 7.3,-22.2 7.3,-23 9.025,-23
THERM_wireless on Top Layer "Top Layer-No Net 1" (solid, pour order 106): 9.625,-23.41 9.625,-24.675 8.925,-24.675 8.925,-23.8 9.406,-23.319
SYSOUT_wireless on Top Layer "Top Layer-No Net 1" (solid, pour order 76): 16.925,-16 17.825,-16 17.825,-17.15 16.925,-17.15
SW_wireless on Top Layer "Top Layer-No Net 1" (solid, pour order 74): 9.05,-19.05 9.734,-19.05 9.775,-19.15 9.775,-21.35 9.05,-21.35
SW_wireless on Top Layer "Top Layer-No Net 1" (solid, pour order 70): 13.675,-17.375 14.55,-17.375 14.725,-17.55 14.725,-18 13.675,-18
GND on Top Layer "Top Layer-No Net 1" (solid, pour order 68): 14.25,-16.375 16.425,-16.375 16.55,-16.375 16.55,-17.875 17.925,-17.875 17.925,-19.25 16.475,-19.25 14.925,-19.25 14.925,-17.328 14.25,-16.978
VBAT+ on Top Layer "Top Layer-No Net 1" (solid, pour order 66): 14.821,-19.5 17.925,-19.5 17.925,-20.55 14.318,-20.55 14.05,-20.55 13.675,-20.525 13.983,-20.415 14.413,-20.087
VBAT- on Top Layer "Top Layer-No Net 1" (solid, pour order 64): 14.125,-20.875 14.8,-20.875 14.8,-21.5 14.8,-22.2 15.086,-22.55 17.425,-22.55 17.425,-24.25 15.425,-24.25 14.125,-22.95 14.125,-22.075 13.875,-21.825 13.628,-21.825 13.275,-21.075 13.275,-20.875
FB_wireless on Top Layer "Top Layer-No Net 1" (solid, pour order 62): 2.25,-19.2 7.325,-19.2 7.325,-21.4 6.831,-21.4 4.475,-21.4 4.175,-21.7 4.175,-22.95 4.775,-23.55 5.225,-23.55 5.225,-24.725 2.25,-24.725
SW_wireless on Top Layer "Top Layer-No Net 1" (solid, pour order 58): 9.725,-19.55 10.3,-19.55 10.3,-20 11,-20.525 10.214,-21.35 9.725,-21.35
VAC1 on Top Layer "Top Layer-No Net 1" (solid, pour order 56): 10.05,-16.875 10.675,-16.875 11.325,-16.875 11.325,-17.775 10.95,-17.775 10.675,-18.05 10.675,-19.1 10.05,-19.1
AC2 on Top Layer "Top Layer-No Net 1" (solid, pour order 54): 10.675,-22.15 10.675,-23.55 11.55,-23.55 11.55,-22.75 11.55,-21.875 11.025,-21.875 10.95,-21.875
GND on Top Layer "Top Layer-No Net 1" (solid, pour order 52): 12.425,-17.75 13.025,-17.75 13.175,-17.9 13.175,-18.125 12.6,-18.7 12.425,-18.7
SW1_tps on Top Layer "Top Layer-No Net 1" (solid, pour order 26): 10.05,0.8 8.375,0.8 8.375,2.5 9.05,3.175 10.05,3.175
1V8 on Top Layer "Top Layer-No Net 1" (solid, pour order 24): 10.825,1.175 14.5,1.175 14.5,3.8 14.5,4.95 11.225,4.95 10.658,5.177 10.575,5.1 10.825,4.7
VCC_tps62770 on Top Layer "Top Layer-No Net 1" (solid, pour order 20): 4.125,5.425 8.9,5.425 9.6,5.425 9.6,5.362 9.6,5.3 9.028,5.077 8.9,4.869 8.9,3.425 4.125,3.425
GND on Top Layer "Top Layer-No Net 1" (solid, pour order 16): 9.125,4.925 9.125,3.425 10.625,3.425 10.625,4.688 10.428,5.056 10.4,5.075 10.225,5.2 10.075,5.2 9.7,5.025 9.125,5.025
2V8/2A on Top Layer "Top Layer-No Net" (solid, pour order 8): 10.375,19.425 8.225,19.425 7.75,19.9 7.75,21.05 6.975,21.05 6.975,19.425 6.975,16.875 11.525,16.875 11.525,18.275
VCC_fan on Top Layer "Top Layer-No Net" (solid, pour order 0): 10.1,23.2 10.1,24.25 7.85,24.25 7.85,23.2
12V on Top Layer "Top Layer-No Net 1" (solid, pour order 14): 10.45,6.925 10.45,9.05 10.825,9.425 12.125,9.425 12.125,8.925 11.625,8.925 11.25,8.55 11.25,7.175 11,6.925 10.625,6.75 10.5,6.75
NetC36_1 on Top Layer "Top Layer-No Net 1" (solid, pour order 50): 11.05,-18 11.75,-18 11.75,-19.25 11.3,-19.25 10.8,-18.75 10.8,-18.25
AC1 on Top Layer "Top Layer-No Net 1" (solid, pour order 82): 4.475,-13.125 9.725,-13.125 9.725,-18.75 9,-18.75 4.5,-18.75
VCC on Top Layer "Top Layer-No Net 1" (solid, pour order 116): 0.425,28.5 3.25,28.5 3.25,25.5 0.425,25.5
GND on Mid-Layer3 "Top Layer-No Net 1" (solid, pour order 126): -6.825,34.625 36.725,34.625 36.725,-31.7 -6.825,-31.7
AC2 on Mid-Layer3 "Top Layer-No Net 1" (solid, pour order 84): 11.025,-22.1 11.3,-22.1 11.5,-22.3 11.5,-22.7 11.325,-22.875 10.625,-22.875 10.625,-22.5
GND on Bottom Layer "Top Layer-No Net 1" (solid, pour order 94): -6.85,34.625 36.725,34.625 36.725,-31.7 -6.85,-31.7
GND on Mid-Layer2 "Top Layer-No Net 1" (solid, pour order 112): -6.8,34.625 36.725,34.625 36.725,-31.725 -6.8,-31.725

## Silkscreen, mask and mechanical layers (free items; w line width, h text height)
Top Overlay:
  lines w0.15: -5.5,-7.95 35.2,-7.95 ; -5.425,12.75 35.475,12.75 ; 8.1,21.075 9.45,21.075 ; 8.83,-19.025 10.55,-19.025 ; 8.83,-17.85 10.075,-17.85 ; 9.425,17.85 9.425,21.075 ; 9.45,21.575 9.45,21.075 ; 9.475,22.95 9.475,24.35 ; 10.825,21.075 9.45,21.075 ; 11.1,-21.7 13.4,-21.7 ; 11.1,-21.675 11.1,-19.725 ; 11.3,-19.375 13.4,-19.375 13.4,-21.675 ; 11.95,-18.975 13,-18.975 ; 14.825,-17 14.825,-16.425 ; -0.4,31.725 -2.925,31.725 -2.925,34.275 -0.4,34.275 -0.4,31.725 ; -0.4,31.725 -0.4,31.725 ; -3.875,18.225 -3.875,20.775 -1.35,20.775 -1.35,18.225 -3.875,18.225 ; -1.275,18.225 -1.275,20.775 1.25,20.775 1.25,18.225 -1.275,18.225 ; -0.375,31.725 -0.375,34.275 2.15,34.275 2.15,31.725 -0.375,31.725 ; 1.725,-31.275 1.725,-28.725 4.25,-28.725 4.25,-31.275 1.725,-31.275 ; 2.175,31.725 2.175,34.275 4.7,34.275 4.7,31.725 2.175,31.725 ; 4.275,-31.275 4.275,-28.725 6.8,-28.725 6.8,-31.275 4.275,-31.275 ; 4.725,31.725 4.725,34.275 7.25,34.275 7.25,31.725 4.725,31.725 ; 6.725,-15.275 6.725,-12.725 9.25,-12.725 9.25,-15.275 6.725,-15.275 ; 6.725,-12.675 6.725,-10.125 9.25,-10.125 9.25,-12.675 6.725,-12.675 ; 6.825,-31.275 6.825,-28.725 9.35,-28.725 9.35,-31.275 6.825,-31.275 ; 9.375,-31.275 9.375,-28.725 11.9,-28.725 11.9,-31.275 9.375,-31.275 ; 11.925,-31.275 11.925,-28.725 14.45,-28.725 14.45,-31.275 11.925,-31.275 ; 14.475,-31.275 14.475,-28.725 17,-28.725 17,-31.275 14.475,-31.275 ; 29.425,-15.275 29.425,-12.725 31.95,-12.725 31.95,-15.275 29.425,-15.275 ; 29.425,-6.175 29.425,-3.625 31.95,-3.625 31.95,-6.175 29.425,-6.175 ; 29.425,-3.545 29.425,-0.995 31.95,-0.995 31.95,-3.545 29.425,-3.545 ; 29.425,13.125 29.425,15.675 31.95,15.675 31.95,13.125 29.425,13.125 ; 29.425,15.725 29.425,18.275 31.95,18.275 31.95,15.725 29.425,15.725 ; 29.45,-12.675 29.45,-10.125 31.975,-10.125 31.975,-12.675 29.45,-12.675
Mechanical 7:
  the board outline again, w0.5